# EAGLE board fordelings_board (EAGLE 6.3)
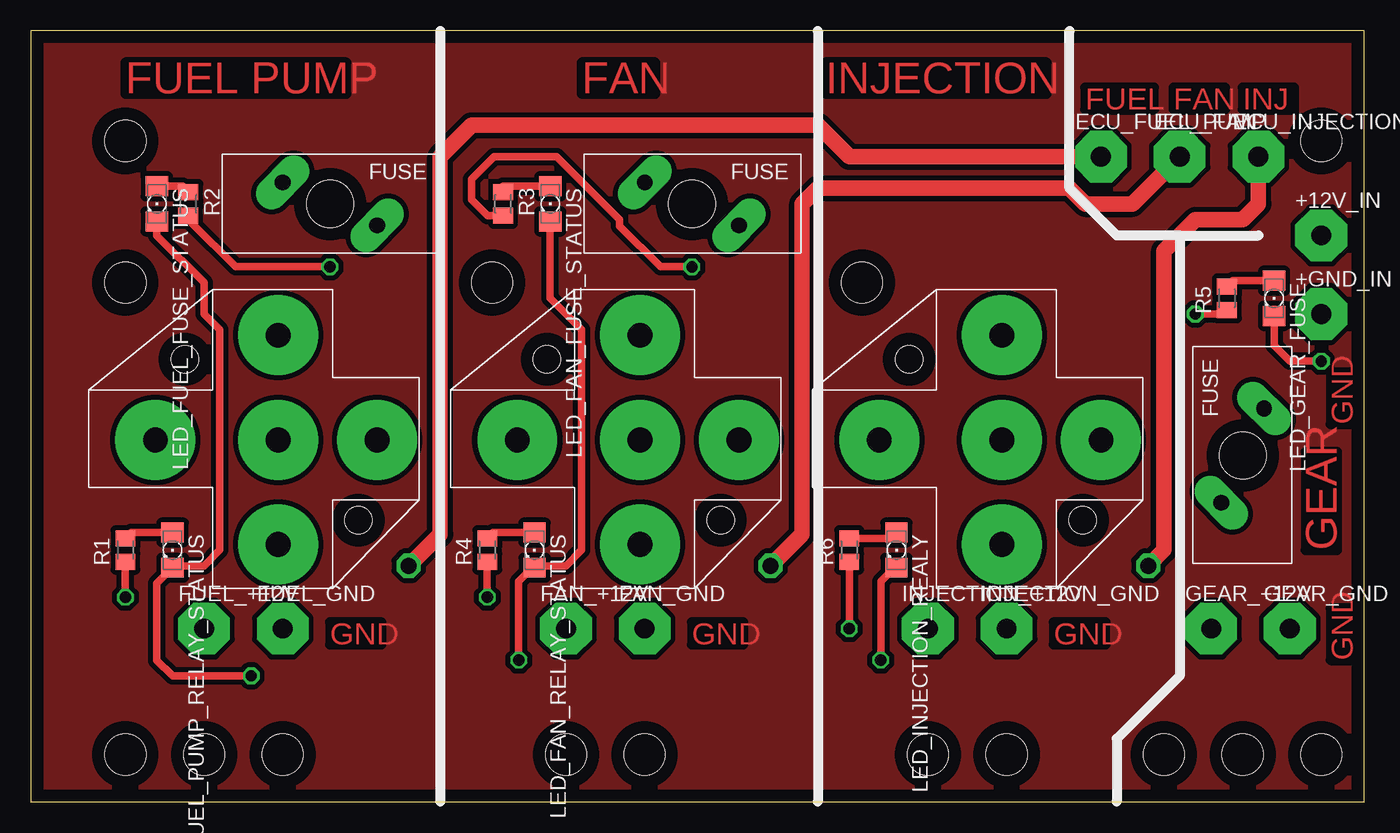
[diagram p0: board, top side]
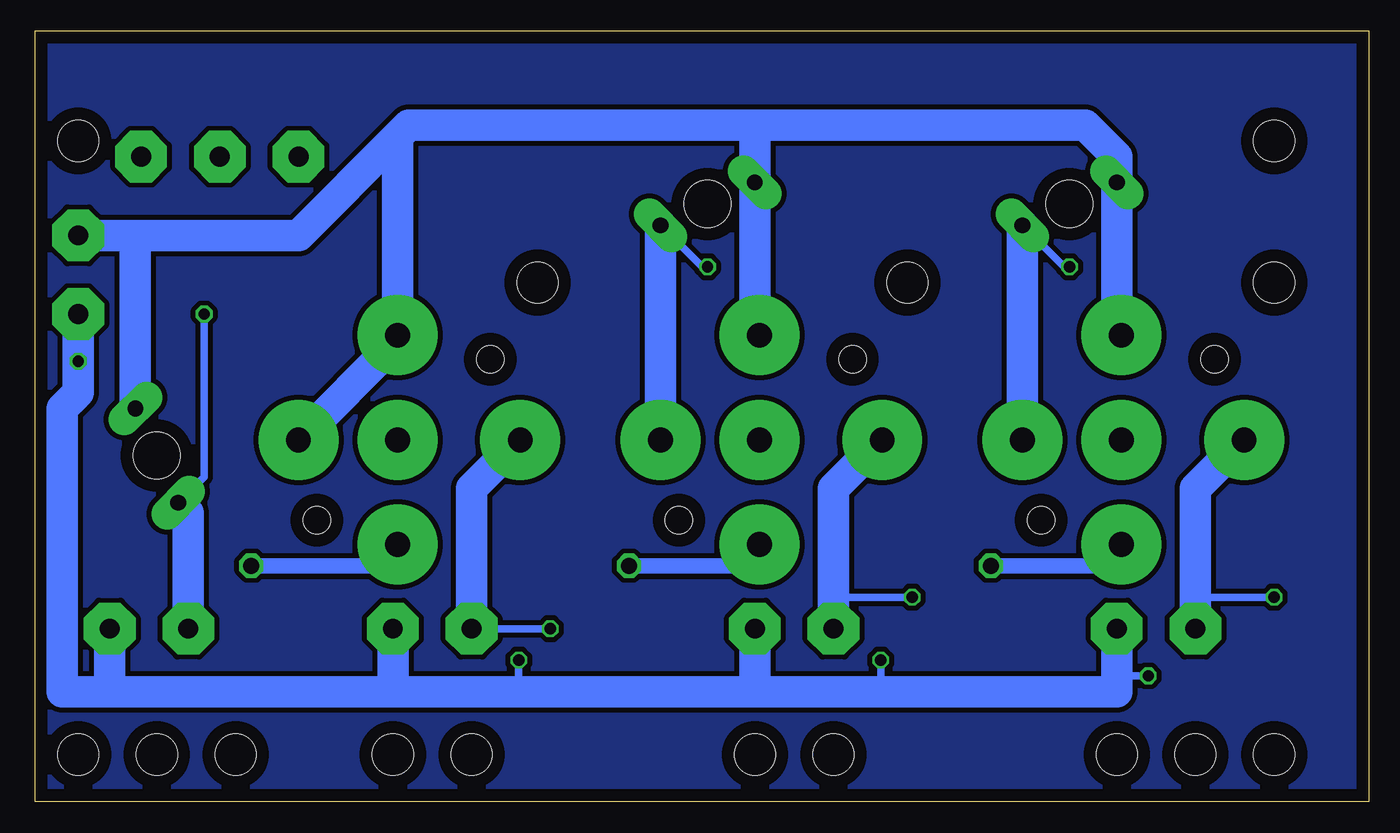
[diagram p1: board, bottom side, seen from below]

Size 107.62 x 62.22 mm. Coordinates in mm from the lower left corner, seen from the top.
Outline: 0,0 107.62,0 107.62,62.22 0,62.22 0,0
Copper layers (1*16): Top 0.035mm / dielectric 1.5mm / Bottom 0.035mm
Design rules "default *": minimum track width 10mil, minimum drill 24mil, track to track 16mil, track to pad 16mil, pad to pad 16mil, via to via 16mil, smd to smd 16mil, copper to edge 40mil, drill to drill 8mil, minimum pad ring 10mil, minimum via ring 8mil, stop-mask expansion 4mil, vias tented up to drill 0mil, thermal gap 10mil

## Footprints (pad centres in the part's own frame; a part is rotated, then mirrored left to right if it is on the bottom)
4,16O1,6 = drill 1.6 pad 4.166 octagon: 1 0,0
FUSE_SOCKET_12V_30A = drill 2 pad 6.452: P$1 0,0; P$2 8,8.45; P$3 8,0; P$4 8,-8.45; P$5 17.9,0 | hole 2.2: 1.5,6.5; 15.5,-6.5
STAND-OFF = hole 3.302: 0,0
1206 = smd 1.6 x 1.803: A -1.422,0; C 1.422,0
M0805 = smd 1.3 x 1.6: 1 -0.95,0; 2 0.95,0
LITTE_FUSE_PAC = drill 1.27 pad 2.54 long: P$1 -1.73,-3.81; P$2 1.73,3.81 | hole 3.78: 0,0

## Placement (x,y rotation side)
+12V_IN  WIREPAD4,16O1,6  [4,16O1,6]  104.14,45.72 0 top
+GND_IN  WIREPAD4,16O1,6  [4,16O1,6]  104.14,39.37 0 top
ECU_FAN  WIREPAD4,16O1,6  [4,16O1,6]  92.71,52.07 0 top
ECU_FUEL_PUMP  WIREPAD4,16O1,6  [4,16O1,6]  86.36,52.07 0 top
ECU_INJECTION  WIREPAD4,16O1,6  [4,16O1,6]  99.06,52.07 0 top
FAN_+12V  WIREPAD4,16O1,6  [4,16O1,6]  43.18,13.97 0 top
FAN_GND  WIREPAD4,16O1,6  [4,16O1,6]  49.53,13.97 0 top
FUEL_+12V  WIREPAD4,16O1,6  [4,16O1,6]  13.97,13.97 0 top
FUEL_GND  WIREPAD4,16O1,6  [4,16O1,6]  20.32,13.97 0 top
FUEL_PUMP_RELAY  FUSE_SOCKET  [FUSE_SOCKET_12V_30A]  27.94,29.21 180 top
GEAR_+12V  WIREPAD4,16O1,6  [4,16O1,6]  95.25,13.97 0 top
GEAR_GND  WIREPAD4,16O1,6  [4,16O1,6]  101.6,13.97 0 top
INJECTION_+12V  WIREPAD4,16O1,6  [4,16O1,6]  72.39,13.97 0 top
INJECTION_GND  WIREPAD4,16O1,6  [4,16O1,6]  78.74,13.97 0 top
JP1  STAND-OFF  [STAND-OFF]  13.97,3.81 0 top
JP2  STAND-OFF  [STAND-OFF]  20.32,3.81 0 top
JP3  STAND-OFF  [STAND-OFF]  43.18,3.81 0 top
JP4  STAND-OFF  [STAND-OFF]  49.53,3.81 0 top
JP5  STAND-OFF  [STAND-OFF]  72.39,3.81 0 top
JP6  STAND-OFF  [STAND-OFF]  78.74,3.81 0 top
JP7  STAND-OFF  [STAND-OFF]  91.44,3.81 0 top
JP8  STAND-OFF  [STAND-OFF]  97.79,3.81 0 top
JP9  STAND-OFF  [STAND-OFF]  37.21,41.91 0 top
JP10  STAND-OFF  [STAND-OFF]  7.62,41.91 0 top
JP11  STAND-OFF  [STAND-OFF]  67.06,41.91 0 top
JP12  STAND-OFF  [STAND-OFF]  7.62,3.81 0 top
JP13  STAND-OFF  [STAND-OFF]  104.14,3.81 0 top
JP14  STAND-OFF  [STAND-OFF]  7.62,53.34 0 top
JP15  STAND-OFF  [STAND-OFF]  104.14,53.34 0 top
LED_FAN_FUSE_STATUS  [1206]  41.91,48.26 270 top
LED_FAN_RELAY_STATUS  [1206]  40.64,20.32 270 top
LED_FUEL_FUSE_STATUS  [1206]  10.16,48.26 270 top
LED_FUEL_PUMP_RELAY_STATUS  [1206]  11.43,20.32 270 top
LED_GEAR_FUSE  [1206]  100.33,40.64 270 top
LED_INJECTION_REALY  [1206]  69.85,20.32 270 top
R1  [M0805]  7.62,20.32 90 top
R2  [M0805]  12.7,48.26 270 top
R3  [M0805]  38.1,48.26 270 top
R4  [M0805]  36.83,20.32 90 top
R5  [M0805]  96.52,40.64 90 top
R6  [M0805]  66.04,20.32 90 top
U$1  FUSE_SOCKET  [FUSE_SOCKET_12V_30A]  86.36,29.21 180 top
U$2  FUSE_SOCKET  [FUSE_SOCKET_12V_30A]  57.15,29.21 180 top
U$3  LITTE_FUSE  [LITTE_FUSE_PAC]  97.79,27.94 180 top
U$4  LITTE_FUSE  [LITTE_FUSE_PAC]  24.13,48.26 90 top
U$5  LITTE_FUSE  [LITTE_FUSE_PAC]  53.34,48.26 90 top

## Library data of the parts
+12V_IN +GND_IN ECU_FAN ECU_FUEL_PUMP ECU_INJECTION FAN_+12V FAN_GND FUEL_+12V FUEL_GND GEAR_+12V GEAR_GND INJECTION_+12V INJECTION_GND = wirepad
FUEL_PUMP_RELAY U$1-U$5 = unicorn_v2
JP1-JP15 = SparkFun
LED_FAN_FUSE_STATUS LED_FAN_RELAY_STATUS LED_FUEL_FUSE_STATUS LED_FUEL_PUMP_RELAY_STATUS LED_GEAR_FUSE LED_INJECTION_REALY = led
R1-R6 = rcl

## Nets
+12V: +12V_IN.1 FUEL_PUMP_RELAY.P$4 U$1.P$1 U$1.P$4 U$2.P$4 U$3.P$1 U$4.P$2 U$5.P$2
ECU_FAN: ECU_FAN.1 U$2.P$2
ECU_FUEL_PUMP: ECU_FUEL_PUMP.1 FUEL_PUMP_RELAY.P$2
ECU_INJECTION: ECU_INJECTION.1 U$1.P$2
N$1: FUEL_PUMP_RELAY.P$1 R2.2 U$4.P$1
N$3: LED_FUEL_FUSE_STATUS.A R2.1
N$4: LED_FAN_RELAY_STATUS.A R4.2
N$5: R3.2 U$2.P$1 U$5.P$1
N$6: INJECTION_+12V.1 R6.1 U$1.P$5
N$7: GEAR_+12V.1 R5.1 U$3.P$2
N$8: LED_GEAR_FUSE.A R5.2
N$11: LED_INJECTION_REALY.A R6.2
N$12: FAN_+12V.1 R4.1 U$2.P$5
N$13: LED_FUEL_PUMP_RELAY_STATUS.A R1.2
N$14: FUEL_+12V.1 FUEL_PUMP_RELAY.P$5 R1.1
N$15: LED_FAN_FUSE_STATUS.A R3.1
PE: +GND_IN.1 FAN_GND.1 FUEL_GND.1 GEAR_GND.1 INJECTION_GND.1 LED_FAN_FUSE_STATUS.C LED_FAN_RELAY_STATUS.C LED_FUEL_FUSE_STATUS.C LED_FUEL_PUMP_RELAY_STATUS.C LED_GEAR_FUSE.C LED_INJECTION_REALY.C

## Tracks (layer width: path | path; a pad name or v marks a point on that pad's centre or on a via)
+12V
  Bottom 2.54: FUEL_PUMP_RELAY.P$4 20.32,38.04 U$4.P$2 20.32,52.07 22.86,54.61 49.53,54.61 | U$2.P$4 49.53,38.04 U$5.P$2 49.53,54.61 | 49.53,54.61 77.47,54.61 78.36,53.72 | 78.36,53.72 U$1.P$4 78.36,37.21 U$1.P$1 | 99.52,45.72 U$3.P$1 | 99.52,45.72 +12V_IN.1 | 99.52,45.72 86.36,45.72 78.36,53.72
ECU_FAN  (via drill 1.3)
  Top 1.27: ECU_FAN.1 88.9,48.26 85.09,48.26 83.82,49.53 63.5,49.53 62.23,48.26 62.23,21.59 v59.69,19.05
  Bottom 1.27: v59.69,19.05 50.86,19.05 U$2.P$2
ECU_FUEL_PUMP  (via drill 1.3)
  Top 1.27: ECU_FUEL_PUMP.1 66.04,52.07 63.5,54.61 35.56,54.61 33.02,52.07 33.02,21.59 v30.48,19.05
  Bottom 1.27: v30.48,19.05 21.65,19.05 FUEL_PUMP_RELAY.P$2
ECU_INJECTION  (via drill 1.3)
  Top 1.27: ECU_INJECTION.1 99.06,48.26 97.79,46.99 93.98,46.99 91.44,44.45 91.44,20.32 v90.17,19.05
  Bottom 1.27: v90.17,19.05 80.07,19.05 U$1.P$2
N$1  (via drill 0.9)
  Top 0.61: R2.2 13.02,46.99 13.02,46.67 16.51,43.18 v24.13,43.18
  Bottom 0.61: v24.13,43.18 24.59,43.18 U$4.P$1
  Bottom 2.54: FUEL_PUMP_RELAY.P$1 U$4.P$1
N$2
  pour Bottom: 0,62.23 107.95,62.23 107.95,0 0,0
N$3
  Top 0.61: LED_FUEL_FUSE_STATUS.A 12.23,49.68 R2.1
N$4
  Top 0.61: LED_FAN_RELAY_STATUS.A 37.3,21.74 R4.2
N$5  (via drill 0.9)
  Top 0.61: R3.2 36.87,47.31 35.56,48.62 35.56,50.27 37.36,52.07 42.44,52.07 47.52,46.99 47.52,46.46 50.8,43.18 v53.34,43.18
  Bottom 0.61: v53.34,43.18 53.8,43.18 U$5.P$1
  Bottom 2.54: U$5.P$1 U$2.P$1
N$6  (via drill 0.9)
  Top 0.61: R6.1 v66.04,13.97
  Bottom 0.61: v66.04,13.97 INJECTION_+12V.1
  Bottom 2.54: INJECTION_+12V.1 72.39,25.28 U$1.P$5
N$7  (via drill 0.9)
  Top 0.61: R5.1 96.52,39.37 v93.98,39.37
  Bottom 0.61: v93.98,39.37 93.98,26.21 U$3.P$2
  Bottom 2.54: GEAR_+12V.1 95.25,23.32 U$3.P$2
N$8
  Top 0.61: LED_GEAR_FUSE.A 96.99,42.06 R5.2
N$9
  pour Top: 0,62.23 107.95,62.23 107.95,0 0,0
N$11
  Top 0.61: R6.2 69.38,21.27 LED_INJECTION_REALY.A
N$12  (via drill 0.9)
  Top 0.61: v36.83,16.51 R4.1
  Bottom 0.61: v36.83,16.51 43.18,16.51
  Bottom 2.54: U$2.P$5 43.18,25.28 43.18,16.51 FAN_+12V.1
N$13
  Top 0.61: LED_FUEL_PUMP_RELAY_STATUS.A 8.09,21.74 R1.2
N$14  (via drill 0.9)
  Top 0.61: v7.62,16.51 R1.1
  Bottom 0.61: v7.62,16.51 13.97,16.51
  Bottom 2.54: FUEL_PUMP_RELAY.P$5 13.97,25.28 13.97,16.51 FUEL_+12V.1
N$15
  Top 0.61: LED_FAN_FUSE_STATUS.A 38.1,49.68 R3.1
PE  (via drill 0.9)
  Top 0.61: LED_FAN_FUSE_STATUS.C 41.91,40.64 44.45,38.1 44.45,20.32 43.18,19.05 40.79,19.05 | 40.79,19.05 LED_FAN_RELAY_STATUS.C | LED_INJECTION_REALY.C 70,19.05 69.85,19.05 68.58,17.78 v68.58,11.43 | LED_FUEL_FUSE_STATUS.C 10.16,45.72 13.97,41.91 13.97,39.37 15.24,38.1 15.24,20.32 13.97,19.05 11.58,19.05 LED_FUEL_PUMP_RELAY_STATUS.C 10.16,17.63 10.16,11.43 11.43,10.16 v17.78,10.16 | 40.79,19.05 40.64,19.05 39.37,17.78 v39.37,11.43 | LED_GEAR_FUSE.C 100.33,36.83 101.6,35.56 v104.14,35.56
  Bottom 0.61: FUEL_GND.1 20.32,10.16 v17.78,10.16 | v39.37,11.43 39.37,8.89 | v68.58,11.43 68.58,8.89
  Bottom 2.54: FUEL_GND.1 20.32,8.89 39.37,8.89 49.53,8.89 | 49.53,8.89 68.58,8.89 78.74,8.89 | 49.53,8.89 FAN_GND.1 | 78.74,8.89 INJECTION_GND.1 | 101.6,8.89 GEAR_GND.1 | 78.74,8.89 101.6,8.89 | 101.6,8.89 105.41,8.89 105.41,31.75 104.14,33.02 v104.14,35.56 +GND_IN.1

## Text on the board
Top: FUEL PUMP | FAN | INJECTION | FUEL | FAN | INJ | GND | GEAR | GND | GND | GND | GND